# Altium PCB FMCOMMS3 - 副本 (2).PcbDoc (part 2 of 2)
Units mil, origin at the board's own origin, x right, y up, seen from the top; angles counter-clockwise.
Board outline 6000 x 4000 mil, 4 copper layers (Top Layer, Layer 1, Layer 2, Bottom Layer), stack 23.756 mil thick; 166 components, 138 nets, 751 pads, 368 vias.
Unrouted connection lines stored in the file: 399.
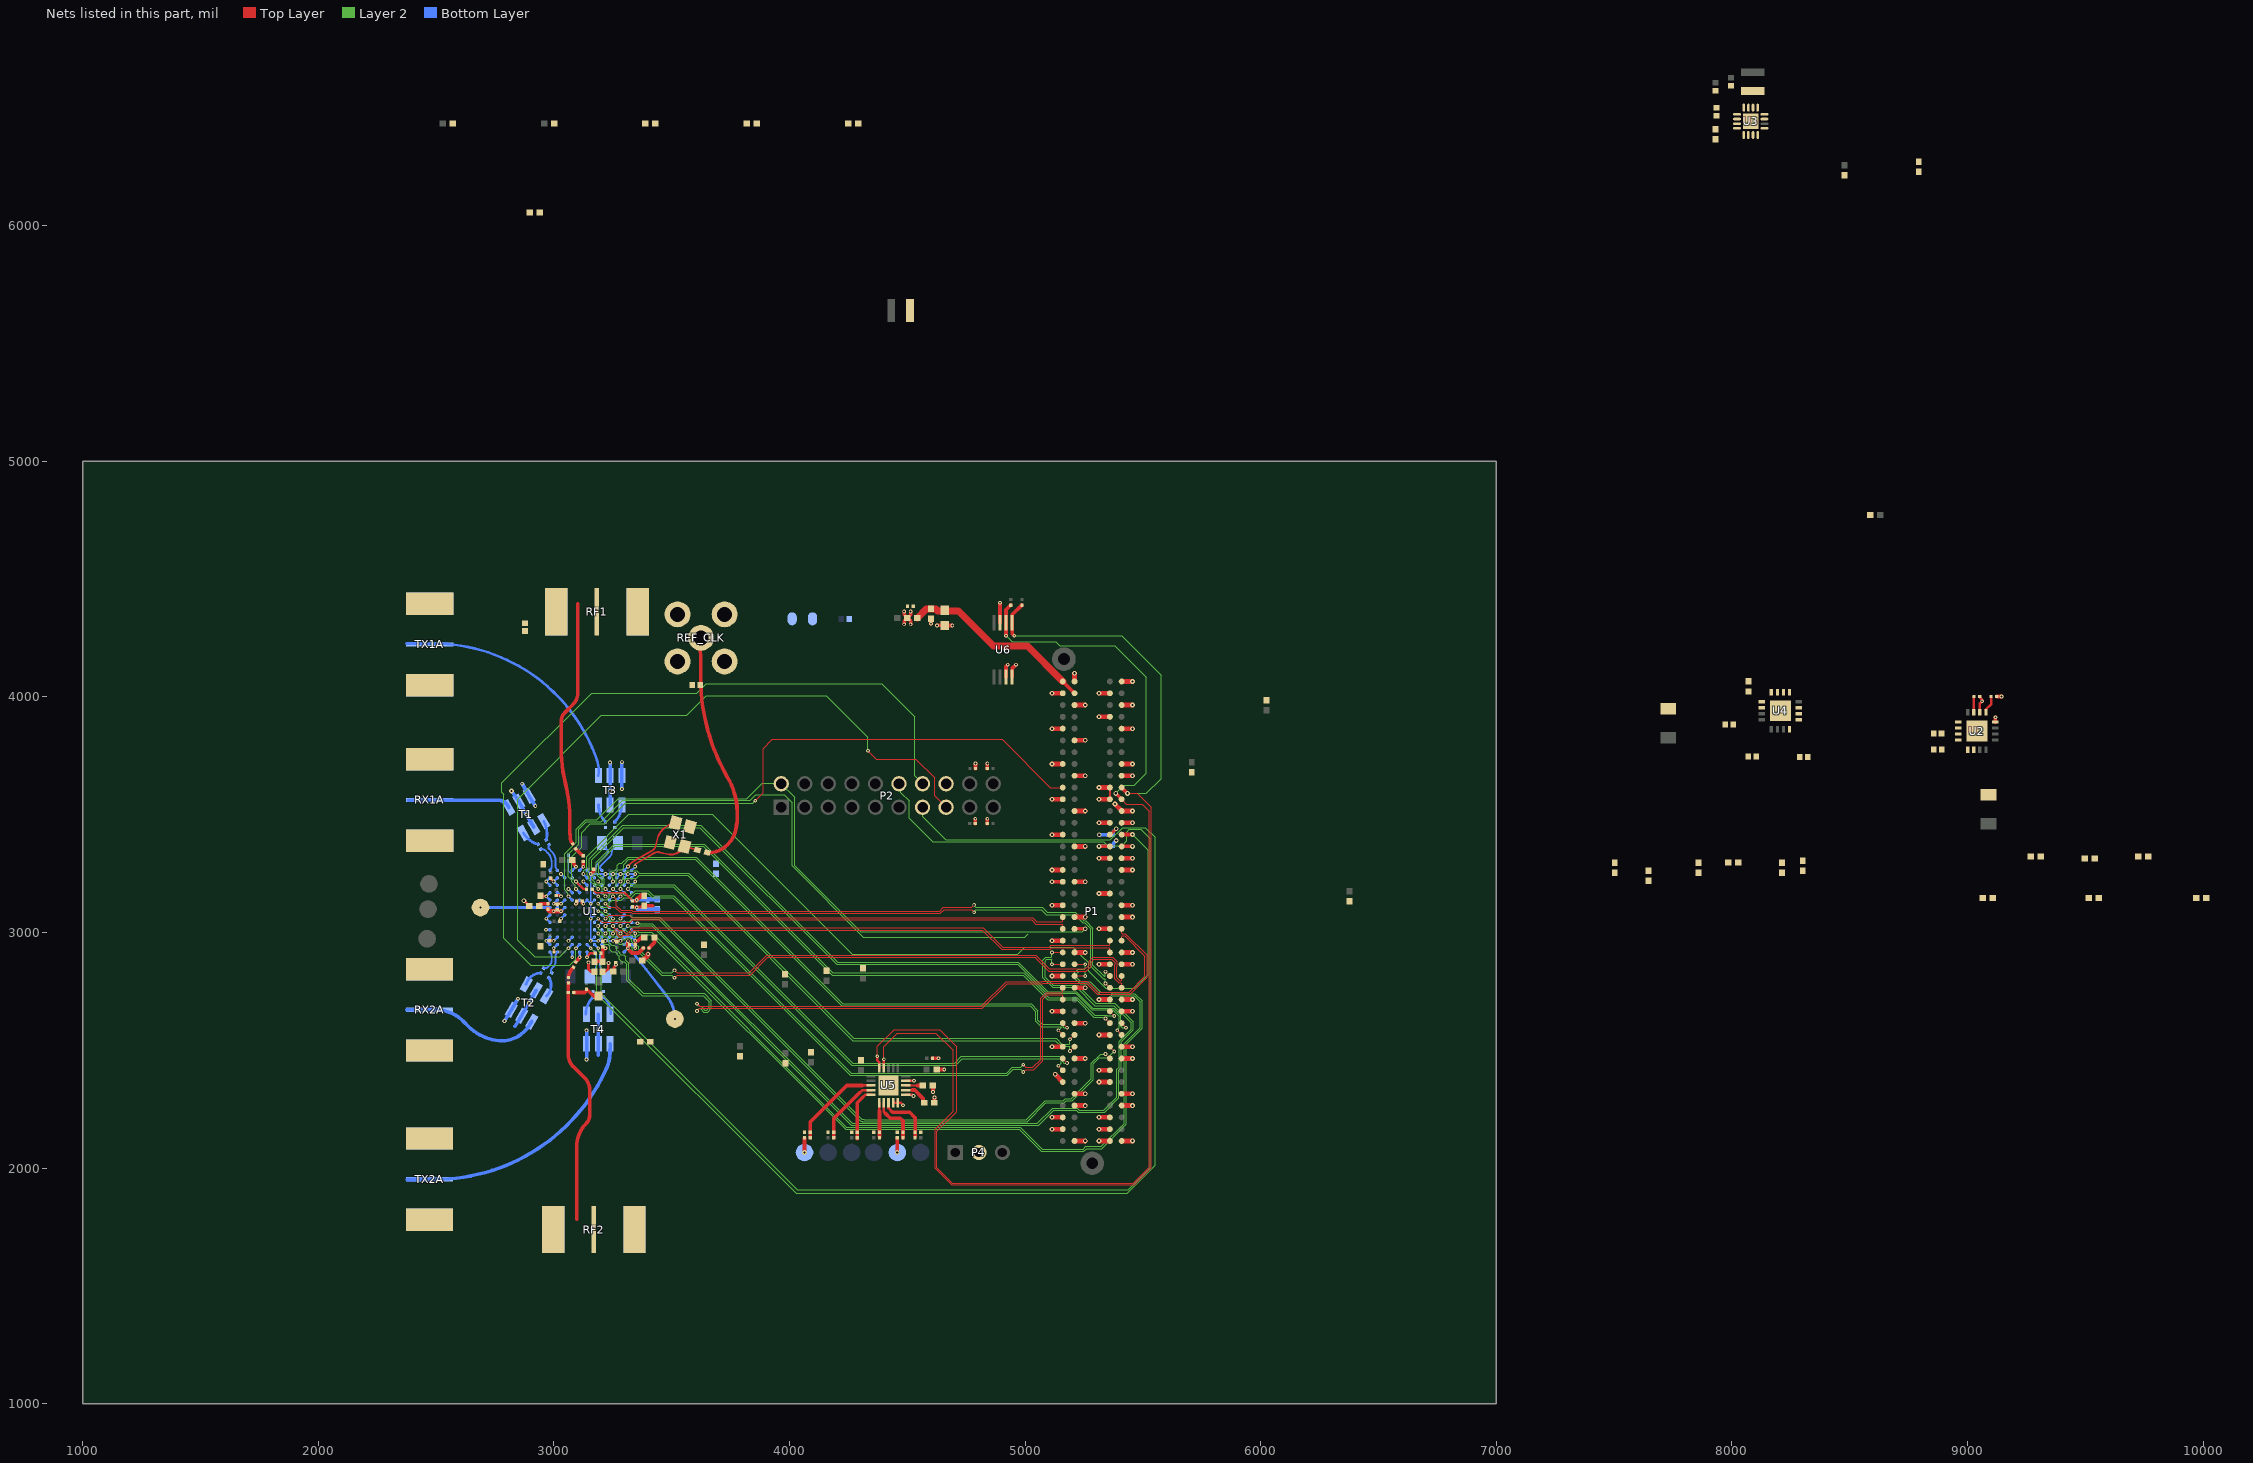
[diagram p3: the nets of this part, all layers, seen from the top]

## Via types
v1: diameter 15.75, hole 7.87, Top Layer to Bottom Layer, tented both sides, 155 vias
v2: diameter 20, hole 10, Top Layer to Bottom Layer, 145 vias
v3: diameter 16, hole 8, Top Layer to Bottom Layer, 68 vias

## Nets (pads, with @x,y where several pads share a name; then routed paths per layer and width w, separated by ;. In a path a pad name is that pad's centre, name@x,y a point inside that pad or via, vN(x,y) a via of type N, cw(c..) or ccw(c..) an arc to the next point about the centre after c; other vN are vias at no path point) (continued)
GND: C1.1 C2.2 C3.2 C4.2 C5.2 C6.2 C7.2 C8.2 C9.2 C10.2 C11.2 C12.2 C13.2 C14.2 C15.2 C16.2 C17.2 C18.2 C19.2 C20.2 C21.2 C22.2 C23.2 C24.2 C25.1 C26.2 C27.2 C28.1 C29.1 C30.1 C31.2 C32.2 C33.2 C34.2 C35.2 C36.2 C37.2 C38.2 C39.2 C40.2 C41.2 C42.2 C43.2 C44.2 C45.2 C46.2 C47.2 C48.2 C49.2 C50.2 C51.2 C52.2 C53.2 C54.2 C55.2 C56.2 C57.2 C58.2 C59.1 C61.1 C62.2 C63.2 C64.2 C71.1 C72.1 C75.1 C76.1 C77.1 C78.2 C79.1 C81.2 DS1.1 P1.C1 P1.C4 P1.C5 P1.C8 P1.C9 P1.C12 P1.C13 P1.C16 P1.C17 P1.C20 P1.C21 P1.C24 P1.C25 P1.C28 P1.C29 P1.C32 P1.C33 P1.C36 P1.C38 P1.C40 P1.D2 P1.D3 P1.D6 P1.D7 P1.D10 P1.D13 P1.D16 P1.D19 P1.D22 P1.D25 P1.D28 P1.D37 P1.D39 P1.G1 P1.G4 P1.G5 P1.G8 P1.G11 P1.G14 P1.G17 P1.G20 P1.G23 P1.G26 P1.G29 P1.G32 P1.G35 P1.G38 P1.G40 P1.H2 P1.H3 P1.H6 P1.H9 P1.H12 P1.H15 P1.H18 P1.H21 P1.H24 P1.H27 P1.H30 P1.H33 P1.H36 P1.H39 P4.2 R4.1 R7.2 R11.1 R23.2 R24.2 R25.2 R26.2 R27.2 R28.2 R29.1 R30.1 R31.1 R32.1 R33.1 R37.1 R38.1 R40.1 R41.1 REF_CLK.1 REF_CLK.2 REF_CLK.3 REF_CLK.4 RF1.1 RF1.2 RF1.3 RF1.4 RF2.1 RF2.2 RF2.3 RF2.4 RX1A.1 RX1A.2 RX1A.3 RX1A.4 RX2A.1 RX2A.2 RX2A.3 RX2A.4 T1.1 T1.2 T1.5 T2.1 T2.2 T2.5 T3.1 T3.2 T3.5 T4.1 T4.2 T4.5 TX1A.1 TX1A.2 TX1A.3 TX1A.4 TX2A.1 TX2A.2 TX2A.3 TX2A.4 U1.A4 U1.A6 U1.B1 U1.B2 U1.B12 U1.C1 U1.C2 U1.C4 U1.C7 U1.C8 U1.C9 U1.C10 U1.C11 U1.C12 U1.D1 U1.D12 U1.E1 U1.F1 U1.F3 U1.F7 U1.F9 U1.F11 U1.G12 U1.H1 U1.H2 U1.H3 U1.H6 U1.H7 U1.H10 U1.J1 U1.J2 U1.K1 U1.K2 U1.K12 U1.L1 U1.L2 U1.L3 U1.L7 U1.L8 U1.L9 U1.L10 U1.L11 U1.L12 U1.M4 U1.M6 U2.6 U2.17 U3.6 U3.7 U3.8 U3.15 U3.16 U3.20 U4.6 U4.17 U5.4 U5.5 U5.6 U5.9 U5.21 U6.3 U6.4 U6.7 X1.2 X1.4 | length 7175.7
  Top Layer w10: C24.2@2943,3154.75 ccw(c2947.25,3159) 2947.25,3152.99 v1(2967.75,3152.99) ; C18.2@2987,3230 ccw(c2991.25,3230) 2988.24,3227 v1(2999.25,3215.99) ; C42.2@2987.48,2965.75 2997.52,2965.75 v1(2999.25,2964.02) ; v1(2999.25,3121.5) v1(3030.74,3121.5) ; C56.2@3000.48,2917.76 v1@3000.48,2931.3 ; C21.2@3011,3157 3021.06,3157 cw(c3021.06,3143.31) v1(3030.74,3152.99) ; C23.2@3026.23,3047.51 3026.23,3053.99 v1(3030.75,3058.51) ; v1(3251.23,2964.01) C26.2@3263.74,2964.01 ; C26.2@3264.72,2964.01 v1(3282.72,2964.01) ; U5.9@4493.84,2370.21 v3(4529.03,2370.21)
  Top Layer w11: v1@3140.98,2896.69 3141.89,2896.69 3141.89,2898.2 3155.69,2912 C11.2@3174,2912 ; U5.4@4440,2277 U5.5@4459.69,2277 4471.81,2277 v3(4482.31,2266.5) ; U5.6@4493.84,2311.15 4521.21,2311.15 v3(4526.84,2305.52) ; C20.2@9051.74,3998.73 9062.24,3988.23 v3(9062.24,3981.23) 9052.54,3971.53 U2.6@9052.53,3933.53
  Top Layer w12: v2(2872.99,3134.76) C77.1@2895.75,3112 ; v1(3147.25,2872.75) 3147.25,2843.75 3157,2834 ; C9.2@3207,2833.75 3219.75,2833.75 3230.75,2844.75 v1@3230.75,2870.25 ; C47.2@3254.75,2830 3254.75,2853.75 v1@3263.5,2862.5 ; C53.2@3336.73,3108 v1@3349.98,3108 ; v1(3345.71,2932.53) v1(3345.71,2964.02) ; v1@3354.48,3108 3370.98,3108
  Top Layer w15.5: C45.2@3078.25,3307 3082.93,3305.06 ccw(c3119.83,3305.06) v1(3093.74,3278.97) ; R40.1@3085,2745 3131.5,2745 3139,2752.5 C72.1@3139,2759 3140,2759 C75.1@3174.64,2724.36 ; R38.1@3121.23,3132.51 3121.23,3125.5 v1(3125.23,3121.49) ; v1(3156.73,3247.47) v1(3156.73,3247.47) 3170,3260.81 C58.2@3170,3268 ; v1(3345.71,2964.02) 3355.75,2964.02 C79.1@3371.73,2980 ; C52.2@3376.73,3113.75 3420.48,3113.75 ; v3(4601,4310.25) C49.2@4601,4330.75 ; C63.2@4607,2466 v3(4632.5,2466) ; v3(4609.25,2322.5) C62.2@4609.25,2350 ; C61.1@4616,2277 v3(4616,2299.5) ; C64.2@4624.25,2418 v3(4657,2418) ; v3(4626,4303) 4658.75,4303 C48.2@4659,4302.75 v3@4691.25,4302.75 ; R29.1@4789,3462 v3(4789,3482.5) ; R32.1@4790,3696 v3(4790,3716.5) ; R30.1@4840,3462 v3(4840,3482.5) ; R31.1@4840,3696 v3(4840,3716.5) ; 4893.61,4378.96 v3(4893.61,4398.96) ; U6.7@4893.81,4313.92 4893.81,4378.76 ; U6.3@4919.41,4084 4919.41,4129.26 v3(4926.61,4136.46) ; U6.4@4945,4084 4945,4119.85 v3(4961.61,4136.46)
  Top Layer w20: C22.2@3376.25,2880 v1@3400,2903.75 ; v1@3400,2908.25 v1(3400.34,2908.25) ; v2(5114.18,2165) P1.H2@5160,2165 ; v2(5114.18,2215) P1.H3@5160,2215 ; v2(5114.18,2515) P1.H9@5160,2515 ; v2(5114.18,2665) P1.H12@5160,2665 ; v2(5114.18,2815) P1.H15@5160,2815 ; v2(5114.18,2965) P1.H18@5160,2965 ; v2(5114.18,3115) P1.H21@5160,3115 ; v2(5114.18,3265) P1.H24@5160,3265 ; v2(5114.18,3415) P1.H27@5160,3415 ; v2(5114.18,3565) P1.H30@5160,3565 ; v2(5114.18,3715) P1.H33@5160,3715 ; v2(5114.18,3865) P1.H36@5160,3865 ; v2(5114.18,4015) P1.H39@5160,4015 ; v2(5127.6,2397.4) P1.H6@5160,2365 ; P1.G1@5210,2115 v2(5255.82,2115) ; P1.G4@5210,2265 v2(5255.82,2265) ; P1.G5@5210,2315 v2(5255.82,2315) ; P1.G8@5210,2465 v2(5255.82,2465) ; P1.G11@5210,2615 v2(5255.82,2615) ; P1.G14@5210,2765 v2(5255.82,2765) ; P1.G17@5210,2915 v2(5255.82,2915) ; P1.G20@5210,3065 v2(5255.82,3065) ; P1.G23@5210,3215 v2(5255.82,3215) ; P1.G26@5210,3365 v2(5255.82,3365) ; P1.G29@5210,3515 v2(5255.82,3515) ; P1.G32@5210,3665 v2(5255.82,3665) ; P1.G35@5210,3815 v2(5255.82,3815) ; P1.G38@5210,3965 v2(5255.82,3965) ; P1.G40@5210,4065 v2(5210,4100) ; v2(5314.18,2165) P1.D2@5360,2165 ; v2(5314.18,2215) P1.D3@5360,2215 ; v2(5314.18,2365) P1.D6@5360,2365 ; v2(5314.18,2415) P1.D7@5360,2415 ; v2(5314.18,2565) P1.D10@5360,2565 ; v2(5314.18,2715) P1.D13@5360,2715 ; v2(5314.18,2865) P1.D16@5360,2865 ; v2(5314.18,3015) P1.D19@5360,3015 ; v2(5314.18,3165) P1.D22@5360,3165 ; v2(5314.18,3315) P1.D25@5360,3315 ; v2(5314.18,3465) P1.D28@5360,3465 ; v2(5314.18,3915) P1.D37@5360,3915 ; v2(5314.18,4015) P1.D39@5360,4015 ; v2(5381.73,3545) P1.C29@5410,3516.73 ; P1.C1@5410,2115 v2(5455.82,2115) ; P1.C4@5410,2265 v2(5455.82,2265) ; P1.C5@5410,2315 v2(5455.82,2315) ; P1.C8@5410,2465 v2(5455.82,2465) ; P1.C9@5410,2515 v2(5455.82,2515) ; P1.C12@5410,2665 v2(5455.82,2665) ; P1.C13@5410,2715 v2(5455.82,2715) ; P1.C16@5410,2865 v2(5455.82,2865) ; P1.C17@5410,2915 v2(5455.82,2915) ; P1.C20@5410,3065 v2(5455.82,3065) ; P1.C21@5410,3115 v2(5455.82,3115) ; P1.C24@5410,3265 v2(5455.82,3265) ; P1.C25@5410,3315 v2(5455.82,3315) ; P1.C28@5410,3465 v2(5455.82,3465) ; P1.C29@5410,3515 v2(5455.82,3515) ; P1.C32@5410,3665 v2(5455.82,3665) ; P1.C33@5410,3715 v2(5455.82,3715) ; P1.C36@5410,3865 v2(5455.82,3865) ; P1.C38@5410,3965 v2(5455.82,3965) ; P1.C40@5410,4065 v2(5455.82,4065)
  Bottom Layer w8: v1(3125.23,3121.49) U1.H6@3140.98,3137.24 v1(3156.74,3121.49) ; U1.M6@3140.98,3263.23 v1(3156.73,3247.47) v1(3219.71,3247.48) ; U1.C7@3172.48,2979.76 v1(3156.74,2964.01) ; U1.F7@3172.48,3074.25 v1(3156.74,3058.5) ; U1.H7@3172.48,3137.24 v1(3156.74,3121.49) ; U1.L7@3172.48,3231.73 v1(3156.73,3247.47) v1(3156.74,3121.49) ; U1.C8@3203.97,2979.76 v1(3188.23,2964.01) ; U1.L8@3203.97,3231.73 v1(3219.71,3247.48) ; U1.C9@3235.47,2979.76 v1(3219.73,2964.01) ; U1.L9@3235.47,3231.73 v1(3251.21,3247.48) ; U1.C10@3266.97,2979.76 v1(3251.23,2964.01) v1(3219.73,2964.01) ; U1.L10@3266.97,3231.73 v1(3282.71,3247.48) ; v1(3282.72,2964.01) U1.C11@3298.46,2979.76 U1.C12@3329.96,2979.76 v1(3345.71,2964.02) v1(3345.71,2995.52) U1.D12@3329.96,3011.26 ; U1.L11@3298.46,3231.73 v1(3314.2,3247.48) ; U1.B12@3329.96,2948.27 v1(3345.71,2932.53) ; U1.K12@3329.96,3200.24 v1(3345.7,3215.99) ; U1.L12@3329.96,3231.73 v1(3345.7,3247.48) v1(3314.2,3247.48) ; v1(3156.74,2964.01) v1(3156.74,3058.5) ; v1(3156.74,2964.01) v1(3188.23,2964.01) ; v1(3156.74,3058.5) v1(3156.74,3121.49) ; v1(3188.23,2964.01) v1(3219.73,2964.01) ; v1(3219.71,3247.48) v1(3251.21,3247.48) ; v1(3251.21,3247.48) v1(3282.71,3247.48) ; v1(3282.71,3247.48) v1(3314.2,3247.48)
  Bottom Layer w10: v1(2966.73,3011.26) U1.D1@2983.5,3011.26 ; U1.B1@2983.5,2948.27 v1(2967.75,2964.02) U1.C1@2983.5,2979.76 ; U1.E1@2983.5,3042.76 v1(2967.76,3058.5) U1.F1@2983.5,3074.25 ; U1.H1@2983.5,3137.24 v1(2967.75,3152.99) U1.J1@2983.5,3168.74 ; U1.K1@2983.5,3200.24 v1(2967.75,3215.99) U1.L1@2983.5,3231.73 ; v1(2999.25,2932.53) U1.B2@3015,2948.27 ; v1(2999.25,2964.02) U1.C2@3015,2979.76 ; v1(2999.25,3121.5) U1.H2@3015,3137.24 ; U1.J2@3015,3168.74 v1(3030.74,3152.99) ; U1.K2@3015,3200.24 2999.26,3215.99 U1.L2@3015,3231.73 ; v1(3030.75,3058.51) U1.F3@3046.49,3074.25 ; v1(3030.74,3121.5) U1.H3@3046.49,3137.24 ; v1(3030.75,3247.48) U1.L3@3046.49,3231.73 ; v1(3062.24,2964.02) U1.C4@3077.99,2979.76 ; v1(3077.99,2894.5) U1.A4@3077.99,2916.77 ; U1.M4@3077.99,3263.23 v1(3093.74,3278.97) ; v1(3140.98,2894.5) U1.A6@3140.98,2916.77 ; U1.F9@3235.47,3074.25 v1(3251.21,3058.51) ; U1.H10@3266.97,3137.24 v1(3282.71,3152.99) ; v1(3282.72,3058.51) U1.F11@3298.46,3074.25 ; U1.G12@3329.96,3105.75 v1(3352.23,3105.75)
  Bottom Layer w15.5: v3(2790.56,2624.31) T2.1@2819.8,2671.58 v3(2847.56,2718.31) ; v2(2820.57,3600.36) T1.2@2851.82,3555.21 v3(2883.07,3501.08) T1.5@2914.32,3446.95 ; 2834.56,2601.31 T2.2@2863.1,2646.58 v3(2894.35,2700.71) T2.5@2925.61,2754.84 ; v3(2865.57,3631.08) T1.1@2895.12,3580.21 v3(2921.57,3536.08) ; v3(3139,2460.7) T4.1@3139,2526.99 v3(3139.23,2584.47) ; 3189,2479.7 v3(3189,2585.47) T4.5@3189,2652 ; v3(3238.78,3721.52) T3.2@3239,3666.01 v3(3239,3600.52) T3.5@3239,3541 ; v3(3288.78,3608.52) T3.1@3289,3666.01 v3(3288.78,3722.52)
  Bottom Layer w20: v1(3352.23,3105.75) 3359.23,3098.75 C54.2@3441.73,3098.75
  other v1: 3263.44,2862.72 3232,2870
  other v3: 4691.5,4303
GPO0: P2.12 U1.B7 | length 5632.1
  Layer 2 w4: v1(3188.23,2932.52) 3189.17,2931.58 3189.17,2921.83 3202,2909 3202,2740 4034,1908 5438,1908 5531,2001 5531,3398 5492,3437 5443,3437 5432,3426 5432,3388 5411.83,3367.83 5350.17,3367.83 5333,3385 4608,3385 4508.25,3484.75 4508.25,3557.75 4473.5,3592.5 4473.5,3622.5 P2.12@4465,3631
  Bottom Layer w10: U1.B7@3172.48,2948.27 v1(3188.23,2932.52)
GPO1: P2.13 U1.B6 | length 5497.1
  Layer 2 w4: v1(3156.73,2932.52) 3183,2906.25 3183,2737 4028,1892 5433.31,1892 5553,2011.69 5553,3403 5511,3445 5414.36,3445 5362.36,3393 4663,3393 4565,3491 P2.13@4565,3531
  Bottom Layer w10: U1.B6@3140.98,2948.27 v1(3156.73,2932.52)
GPO2: P2.14 U1.B5 | length 3378.5
  Layer 2 w4: v1(3093.74,2932.53) 3094,2932.27 3093.74,2932.01 3093.74,2886.74 3067,2860 2903,2860 2788,2975 2788,3587 2780,3595 2780,3635 3160,4015 3606,4015 3647,4056 4391,4056 4531,3916 4531,3665 P2.14@4565,3631
  Bottom Layer w10: v1(3093.74,2932.53) U1.B5@3109.49,2948.27
GPO3: P2.15 U1.B4 | length 3152.3
  Top Layer w4: v3(4333,3771) 4368,3736 4536,3736 4616,3656 4616,3580 P2.15@4665,3531
  Layer 2 w4: v1(3062.24,2932.53) 3025.71,2896 2918,2896 2847,2967 2847,3566 3202,3921 3564,3921 3647,4004 4156,4004 4332,3828 v3@4332,3772
  Bottom Layer w10: v1(3062.24,2932.53) U1.B4@3077.99,2948.27
NetC4_1: C4.1 C5.1 C6.1 C28.2 E1.2 L1.2 U3.10 U3.11 U3.12
NetC12_1: C12.1 C13.1 C14.1 C15.1 C16.1 C17.1 R1.1 R2.2 U2.10 U2.11 U2.12 U2.13 U2.14
NetC20_1: C20.1 U2.7 | length 66.9
  Top Layer w11: U2.7@9026.94,3933.53 C20.1@9026.94,4000.43
NetC29_2: C29.2 U3.9
NetC31_1: C31.1 C32.1 C33.1 C34.1 C35.1 C36.1 R8.1 R9.2 U4.10 U4.11 U4.12 U4.13 U4.14
NetC39_1: C39.1 U4.7
NetC60_1: P2.16
NetC61_2: C61.2 U5.7 | length 107.7
  Top Layer w10: U5.7@4493.84,2330.84 4521.53,2330.84
  Top Layer w15.5: 4521.53,2330.84 4531.53,2330.84 4567.09,2295.28 C61.2@4567.09,2275.53
NetC62_1: C62.1 U5.8 | length 74.2
  Top Layer w10: U5.8@4493.84,2350.52 4541.84,2350.52
  Top Layer w15.5: 4541.84,2350.52 C62.1@4568.09,2350.52
NetC65_2: C65.2 T1.6 | length 80.7
  Bottom Layer w11.55: T1.6@2957.62,3471.95 cw(c2854.31,3417.17) 2970.36,3431.55 cw(c2873.51,3419.55) C65.2@2967.64,3393.78
NetC66_2: C66.2 T1.4 | length 80.5
  Bottom Layer w11.55: T1.4@2871.02,3421.95 ccw(c2961.2,3474.02) 2908.92,3383.96 ccw(c2961.15,3473.93) C66.2@2933,3373.78
NetC67_2: C67.2 T2.6 | length 84.6
  Bottom Layer w11.55: T2.6@2882.31,2779.84 cw(c2945.83,2761.72) 2920.56,2822.75 cw(c2945,2763.73) C67.2@2945,2827.61
NetC68_2: C68.2 T2.4 | length 84.6
  Bottom Layer w11.55: T2.4@2968.91,2729.84 ccw(c2924.25,2775.63) 2988.16,2778.25 ccw(c2933.31,2778.25) C68.2@2979.64,2807.61
NetC69_2: C69.2 T3.6 | length 80.9
  Bottom Layer w11.55: C69.2@3258,3469 ccw(c3186.22,3541.72) T3.6@3288.4,3541.72
NetC70_2: C70.2 T3.4 | length 80.5
  Bottom Layer w11.55: T3.4@3189.4,3541.72 ccw(c3293.53,3541.72) C70.2@3219,3469
NetC73_2: C73.2 T4.6 | length 80.9
  Bottom Layer w11.55: T4.6@3135.6,2652.28 cw(c3237.78,2652.28) C73.2@3166,2725
NetC74_2: C74.2 T4.4 | length 79.4
  Bottom Layer w11.55: C74.2@3211,2725 3213.65,2723.88 cw(c3142.8,2654.75) T4.4@3241.79,2654.75
NetC77_2: C77.2 R34.2 | length 34.8
  Top Layer w15.5: C77.2@2940.25,3122 R34.2@2975,3122
NetC79_2: C79.2 R35.2 | length 54.5
  Top Layer w15.5: R35.2@3404,2934 3427.5,2957.5 C79.2@3427.5,2978.75
NetC80_1: C80.1 R36.2 | length 44.5
  Top Layer w15.5: R36.2@3092.25,3355.11 ccw(c3467.09,3729.95) C80.1@3125,3325
NetC82_1: C82.1 R39.2 | length 49.2
  Top Layer w15.5: R39.2@3061.75,2808.75 cw(c3135.42,2799.63) C82.1@3082.93,2852.12
NetC83_1: C83.1 U1.M12 X1.1 | length 329.3
  Top Layer w8: v1@3345.71,3278.98 cw(c3351.62,3284.33) 3347.64,3291.23 3373.83,3306.33 3391.3,3316.4 3426.58,3336.81 cw(c3441.74,3310.61) 3449.87,3339.77 3484.25,3331.69 ccw(c3497.25,3387.01) 3519.46,3334.7 3536.42,3343.34 X1.1@3555.24,3359.48 ; X1.1@3555,3365 X1.1@3556.64,3364.55 ; X1.1@3556.64,3369.28 X1.1@3556.64,3364.55 ; C83.1@3610,3350 X1.1@3556.64,3364.55
  Bottom Layer w8: U1.M12@3329.96,3263.23 3329.96,3264.09 3345,3279.14 v1(3345,3280)
NetC83_2: C83.2 R41.2 REF_CLK.5 | length 988.6
  Top Layer w15.5: REF_CLK.5@3621.53,4230.17 cw(c-4477.47,4050.17) 3623.53,4050.49 ccw(c3639.03,4050.49) 3623.54,4049.94 ccw(c4471.09,4084.38) 3736.53,3660.17 cw(c3461.67,3501.45) 3772.05,3435.06 cw(c3651.14,3460.93) C83.2@3653.87,3337.31
NetDS1_2: DS1.2 R13.1
NetL2_1: L2.1 U3.1 U3.2 U3.3
NetP1_D27: P1.D27 R14.1 | length 65.7
  Top Layer w15.5: P1.D27@5361.73,3415 v2(5386.73,3440)
  Bottom Layer w15.5: R14.1@5373.73,3415 5373.73,3427 v2(5386.73,3440)
NetP1_D30: P1.D30 P1.D31 | length 141.6
  Top Layer w9: P1.D30@5360,3565 P1.D31@5360,3615
  Top Layer w20: v2(5314.18,3565) P1.D30@5360,3565 ; v2(5314.18,3615) P1.D31@5360,3615
NetR2_1: R2.1 R4.2 U2.9
NetR6_2: R6.2 R7.1 U3.5
NetR9_1: R9.1 R11.2 U4.9
NetR17_2: R17.2 R23.1 U5.3 | length 270.3
  Top Layer w11: U5.3@4420.31,2277 4420.31,2254 4432.81,2241.5
  Top Layer w15.5: 4432.81,2241.5 4437.81,2236.5 4510.31,2236.5 4533.31,2213.5 4533.31,2186.5 R23.1@4533.31,2151 ; R17.2@4533.31,2132.5 R23.1@4533.31,2151 ; 4533.31,2187.5 R23.1@4533.31,2151
NetR18_2: R18.2 R24.1 U5.2 | length 240.2
  Top Layer w11: U5.2@4400.63,2277 4400.62,2238.69 4407.81,2231.5
  Top Layer w15.5: 4407.81,2231.5 4427.81,2211.5 4470.31,2211.5 4482.31,2199.5 4482.31,2186.5 R24.1@4482.31,2157 ; R18.2@4482.31,2128 R24.1@4482.31,2153 ; 4482.31,2185.5 R24.1@4482.31,2157 ; R24.1@4482.31,2153 R24.1@4482.31,2157 ; R24.1@4482.31,2153 R24.1@4482.31,2157
NetR19_2: R19.2 R25.1 U5.1 | length 180.6
  Top Layer w11: 4380.94,2242.13 U5.1@4380.94,2277
  Top Layer w15.5: 4380.94,2242.13 4382.31,2240.76 4382.31,2186.5 ; R19.2@4382.31,2131.5 R25.1@4382.31,2152 ; R25.1@4382.31,2152 4382.31,2186.5 ; R25.1@4382.31,2152 4382.31,2186.5
NetR20_2: R20.2 R26.1 U5.20 | length 224.4
  Top Layer w11: 4311.29,2300.52 4321.92,2311.15 U5.20@4346.79,2311.15
  Top Layer w15.5: R20.2@4288.29,2125.52 4288.29,2153 4288.29,2180.52 4288.29,2277.52 4311.29,2300.52
NetR21_2: R21.2 R27.1 U5.19 | length 290.5
  Top Layer w11: 4297.54,2319.27 4309.1,2330.83 U5.19@4346.79,2330.84
  Top Layer w15.5: R21.2@4188.29,2128.02 4188.29,2154 4188.29,2180.52 4188.29,2210.02 4297.54,2319.27
NetR22_2: R22.2 R28.1 U5.18 | length 389.9
  Top Layer w11: 4308.79,2350.52 U5.18@4346.79,2350.52
  Top Layer w15.5: R22.2@4088.29,2128.02 4088.29,2180.52 4088.29,2195.02 4243.79,2350.52 4308.79,2350.52
NetR33_2: R33.2 U1.L4 | length 78.9
  Bottom Layer w4: R33.2@3062,3304 3064,3302 3064,3258.84 3077.99,3244.85 U1.L4@3077.99,3231.73
NetR36_1: R36.1 R37.2 RF1.5 | length 1048.4
  Top Layer w15.5: R36.1@3081,3375.39 cw(c3108.78,3403.17) 3069.5,3402.5 ccw(c2961.03,3402.46) 3068.62,3416.25 cw(c3176.23,3429.96) 3067.75,3430 3067.75,3486.25 ccw(c2482.6,3486.25) 3049.5,3631.25 cw(c3597.51,3771.42) 3032,3758.75 3032,3897.54 cw(c3083.21,3897.54) 3047,3933.75 3082,3968.75 ccw(c3033.72,4017.03) 3102,4017.03 3102,4393.75
NetR39_1: R39.1 R40.2 RF2.5 | length 1048.1
  Top Layer w15.5: R39.1@3062,2785 cw(c2161.25,2785) 3061.25,2748.25 3061.25,2480.84 ccw(c3132.09,2480.84) 3082,2430.75 3132,2380.75 cw(c3083.72,2332.47) 3152,2332.47 3152,2224.46 cw(c3100.79,2224.46) 3137,2188.25 ccw(c3233.57,2091.68) 3097,2091.68 3097,1783.25
NetRX1A_5: RX1A.5 T1.3 | length 438.6
  Bottom Layer w15.5: RX1A.5@2383,3561.61 2734.97,3561.61 2762.61,3560.83 2774.95,3560.05 cw(c2762.67,3512.44) T1.3@2808.52,3530.21
NetRX2A_5: RX2A.5 T2.3 | length 601.9
  Bottom Layer w15.5: RX2A.5@2375.06,2672.28 2495.92,2672.28 cw(c2495.93,2501.67) 2616.56,2622.31 2639.16,2599.7 ccw(c2782.55,2743.1) 2782.56,2540.31 ccw(c2782.56,2667.9) 2872.78,2577.68 2884.84,2589.74 2886.64,2591.55 T2.3@2906.4,2621.58
NetT3_3: T3.3 TX1A.5 | length 1090.4
  Bottom Layer w11.55: TX1A.5@2374.28,4226.03 2489.28,4226.03 cw(c2489.28,3492.27) 3183.65,3729.44 cw(c3059.48,3687.02) T3.3@3189,3666.01
NetT4_3: T4.3 TX2A.5 | length 1139.7
  Bottom Layer w15.5: TX2A.5@2378.73,1951.47 2493.73,1951.47 ccw(c2493.73,2752.58) 3227.23,2430.47 ccw(c3061.15,2492.01) 3238.23,2488.47 T4.3@3239,2526.99
NetU1_M11: U1.M11 X1.3 | length 320.5
  Top Layer w8: v1@3314.21,3278.98 cw(c3381.41,3232.64) 3340.64,3303.36 3366.83,3318.46 3384.29,3328.54 3391.69,3332.8 3396.07,3335.34 3419.57,3348.93 ccw(c3406.22,3372.01) 3432.68,3368.71 3441.02,3402.57 cw(c3520.05,3376.9) 3472.09,3444.76 3512.38,3473.08 3516.2,3469.26 X1.3@3518.2,3469.26
  Bottom Layer w8: U1.M11@3298.46,3263.23 3298.46,3263.34 3315,3279.89 v1(3315,3280)
PG_1P3_A: R3.2 U2.5 | length 59.3
  Top Layer w11: U2.5@9077,3945 9101.61,3969.61 R3.2@9101.61,3994.11
PG_1P3_B: R10.2 U4.5
PG_1P8V: U2.4 U4.4 | length 20.1
  Top Layer w15.5: U2.4@9118.48,3893.18 v3(9118.48,3913.29)
PG_1V8: R5.2 U3.4
PG_FMC: P1.D1 U3.13 | length 45.8
  Top Layer w20: v2(5314.18,2115) P1.D1@5360,2115
RESETB: P1.H31 R42.2 U1.K5 | length 2715.9
  Top Layer w4: v3(3855,3559) 3888,3592 3888,3780 3928,3820 4903,3820 5108,3615 P1.H31@5160,3615
  Top Layer w10: v1(3093.75,3215.99) 3093.75,3215.25 3094.75,3215.25 3126,3184 3138,3184 R42.2@3139,3183
  Layer 2 w4: v1(3093.75,3215.99) 3076,3233.74 3076,3320.31 3118,3362.31 3118,3424 3155,3461 3216,3461 3304,3549 3844,3549 v3@3855,3560
  Bottom Layer w10: v1(3093.75,3215.99) U1.K5@3109.49,3200.24
RX1A_N: C65.1 U1.M2 | length 122.4
  Bottom Layer w8: C65.1@2979.64,3373 2979.64,3370.21 cw(c2975.13,3370.21) 2978.32,3367.02 ccw(c2981.51,3363.84) 2977,3363.84 2977,3361.48 ccw(c2987.19,3361.48) 2979.98,3354.28 2992.14,3342.12 cw(c2955.58,3305.56) 3007.29,3305.56 3007.29,3281.84 ccw(c3033.61,3281.84) U1.M2@3015,3263.23
RX1A_P: C66.1 U1.M1 | length 116
  Bottom Layer w8: C66.1@2945,3353 2945.21,3353.21 2951.76,3353.21 cw(c2951.76,3337.41) 2962.94,3348.58 2974.76,3336.76 cw(c2935.05,3297.05) 2991.21,3297.05 2991.21,3281.84 cw(c2964.89,3281.84) U1.M1@2983.5,3263.23
RX2A_N: C67.1 U1.A1 | length 90.2
  Bottom Layer w8: C67.1@2957,2848.39 2957.08,2848.31 2963.63,2848.31 ccw(c2963.63,2864.12) 2974.81,2852.94 2980.69,2858.83 ccw(c2955.3,2884.22) 2991.21,2884.22 2991.21,2898.16 ccw(c2964.89,2898.16) U1.A1@2983.5,2916.77
RX2A_P: C68.1 U1.A2 | length 97
  Bottom Layer w8: C68.1@2991,2828.39 2991,2831.31 ccw(c2986.81,2831.31) 2989.77,2834.28 cw(c2992.73,2837.24) 2988.55,2837.24 2988.55,2839.72 cw(c2998.73,2839.72) 2991.53,2846.92 2997.92,2853.31 ccw(c2975.29,2875.94) 3007.29,2875.94 3007.29,2898.16 cw(c3033.61,2898.16) U1.A2@3015,2916.77
RX_D0_N: P1.H8 U1.K11 | length 2271.3
  Top Layer w4.96: P1.H8@5160,2464.18 v1(5178.54,2445.64)
  Layer 2 w4.02: v1(3314.21,3215.99) 3325.45,3204.75 3337.31,3204.75 3339.95,3202.11 3510.65,3202.11 4267.76,2445 4701.1,2445 4729.62,2473.52 5159,2473.52 5166.64,2465.88 5166.64,2455.08 5162.89,2451.33 5162.89,2447.99 5165.24,2445.64 v1(5178.54,2445.64)
  Bottom Layer w4.96: U1.K11@3298.46,3200.24 v1(3314.21,3215.99)
RX_D0_P: P1.H7 U1.J12 | length 2259.5
  Top Layer w4.96: v1(5141.46,2434.36) P1.H7@5160,2415.82
  Layer 2 w4.02: v1(3314.21,3184.49) 3325.45,3195.73 3333.57,3195.73 3336.21,3193.09 3506.91,3193.09 4264.02,2435.98 4704.84,2435.98 4733.36,2464.5 5155.27,2464.5 5157.62,2462.15 5157.62,2458.81 5153.87,2455.06 5153.87,2445.18 5143.05,2434.36 v1(5141.46,2434.36)
  Bottom Layer w4.96: v1(3314.21,3184.49) U1.J12@3329.96,3168.74
RX_D1_N: P1.G10 U1.K10 | length 2312.2
  Top Layer w4.96: v1(5190.64,2546.46) P1.G10@5209.18,2565
  Layer 2 w4.02: v1@3282.72,3217.72 v1(3282.72,3215.99) 3296.71,3229.98 3296.71,3249.62 3308.45,3261.36 3351.45,3261.36 3361.88,3250.93 3387,3250.93 ; 3387.02,3250.92 3571.84,3250.92 4272.76,2550 5132.53,2550 5156.56,2525.97 5188.29,2525.97 5190.64,2528.32 v1(5190.64,2546.46)
  Bottom Layer w4.96: U1.K10@3266.97,3200.24 v1(3282.72,3215.99)
RX_D1_P: P1.G9 U1.J11 | length 2311.1
  Top Layer w4.96: v1(5190.64,2496.46) P1.G9@5209.18,2515
  Layer 2 w4.02: v1(3282.71,3184.49) 3284.95,3186.73 3284.95,3197.95 3300.33,3213.32 3300.33,3221.74 3309.46,3230.87 3350.87,3230.87 3361.91,3241.91 3383.27,3241.91 ; 3383.28,3241.9 3568.1,3241.9 4269.02,2540.98 5128.79,2540.98 5152.82,2516.95 5188.29,2516.95 5190.64,2514.6 v1(5190.64,2496.46)
  Bottom Layer w4.96: v1(3282.71,3184.49) U1.J11@3298.46,3168.74
RX_D2_N: P1.H11 U1.K9 | length 2393.3
  Top Layer w4.96: P1.H11@5160,2614.18 v1(5178.54,2595.64)
  Layer 2 w4.02: v1(3251.22,3215.99) 3249.16,3218.05 3249.16,3229.89 3236.67,3242.39 3236.67,3252.57 3245.46,3261.36 3257.59,3261.36 3268.84,3272.61 3268.84,3284.73 3276.97,3292.86 3289.09,3292.86 3315.25,3319.02 3603.74,3319.02 4225.76,2697 5025.43,2697 5054.92,2667.52 5054.92,2626.79 5072.34,2609.37 5154.74,2609.37 5162.38,2601.73 5162.38,2597.99 5164.73,2595.64 v1(5178.54,2595.64)
  Bottom Layer w4.96: U1.K9@3235.47,3200.24 v1(3251.22,3215.99)
RX_D2_P: P1.H10 U1.J10 | length 2383.2
  Top Layer w4.96: v1(5141.46,2584.36) P1.H10@5160,2565.82
  Layer 2 w4.02: v1(3251.22,3184.49) 3265.1,3198.37 3265.1,3256.12 3274.08,3265.1 3288.47,3265.1 3296.6,3273.23 3296.6,3287.62 3318.98,3310 3600,3310 4222.02,2687.98 5021.7,2687.98 5045.9,2663.78 5045.9,2623.05 5068.6,2600.35 5151,2600.35 5153.36,2597.99 5153.36,2594.66 5143.05,2584.36 v1(5141.46,2584.36)
  Bottom Layer w4.96: v1(3251.22,3184.49) U1.J10@3266.97,3168.74
RX_D3_N: P1.D12 U1.K8 | length 2702.2
  Top Layer w4.96: P1.D12@5360,2664.18 v1(5378.54,2645.64)
  Layer 2 w4.02: v1(3188.22,3215.99) 3199.12,3205.09 3202.45,3205.09 3204.8,3207.45 3204.8,3222.44 3180.98,3246.26 3180.98,3298.74 3256.26,3374.02 3638.74,3374.02 4184.74,2828.02 4994.3,2828.02 5100.3,2722.02 5221.86,2722.02 5295.63,2648.24 5347.21,2648.24 5349.81,2645.64 v1(5378.54,2645.64)
  Bottom Layer w4.96: v1(3188.22,3215.99) U1.K8@3203.97,3200.24
RX_D3_P: P1.D11 U1.J9 | length 2658.5
  Top Layer w4.96: v1(5341.46,2634.36) P1.D11@5360,2615.82
  Layer 2 w4.02: v1(3219.72,3184.49) 3208.82,3195.39 3208.82,3198.72 3213.82,3203.71 3213.82,3226.18 3190,3250 3190,3295 3260,3365 3635,3365 4181,2819 4991.97,2819 5096.97,2714 5218.53,2714 5292.31,2640.22 5333.04,2640.22 5338.9,2634.36 v1(5341.46,2634.36)
  Bottom Layer w4.96: v1(3219.72,3184.49) U1.J9@3235.47,3168.74
RX_D4_N: P1.C11 U1.K7 | length 2918.2
  Top Layer w4.96: P1.C11@5410,2614.18 v1(5428.54,2595.64)
  Layer 2 w4.02: v1(3188.23,3184.49) 3188.23,3185 3174.12,3199.12 3172.7,3199.12 3150.98,3220.84 3150.98,3233.59 3142.85,3241.72 3142.85,3256.87 3150.98,3265 3150.98,3312.44 3292.53,3453.99 3623.77,3453.99 4204.74,2873.02 4971.98,2873.02 5095.98,2749.02 5217.54,2749.02 5287.56,2679 5376.16,2679 5407.02,2648.14 5407.02,2602.02 5413.4,2595.64 v1(5428.54,2595.64)
  Bottom Layer w4.96: U1.K7@3172.48,3200.24 v1(3188.23,3184.49)
RX_D4_P: P1.C10 U1.J8 | length 2934.2
  Top Layer w4.96: v1(5391.46,2584.36) P1.C10@5410,2565.82
  Layer 2 w4.02: v1(3219.72,3152.99) 3219.72,3155.28 3217.43,3155.28 3205.84,3166.87 3205.84,3186.52 3190.25,3202.11 3182.47,3202.11 3160,3224.58 3160,3231.23 3162.35,3233.59 3162.48,3233.59 3170.61,3241.72 3170.61,3254.39 3160,3265 3160,3308.7 3296.27,3444.97 3620.03,3444.97 4200,2865 4968.66,2865 5092.66,2741 5214.22,2741 5284.24,2670.98 5372.83,2670.98 5399,2644.82 5399,2595.07 5391.46,2587.53 v1(5391.46,2584.36)
  Bottom Layer w4.96: U1.J8@3203.97,3168.74 v1(3219.72,3152.99)
RX_D5_N: P1.H14 U1.J7 | length 2670.3
  Top Layer w4.96: v3(4992.23,2438.28) 5003.5,2427 5033.34,2427 5066,2459.66 5066,2719.67 5090.81,2744.48 5157.09,2744.48 5160,2747.39 P1.H14@5160,2765
  Layer 2 w4.02: v1(3188.23,3152.99) 3202.11,3139.11 3225.47,3139.11 3235.47,3149.11 3235.47,3156.88 3245.47,3166.87 3288.46,3166.87 3298.61,3156.73 3325.35,3156.73 3344.81,3176.18 3401.57,3176.18 3421.38,3156.38 3508.62,3156.38 4261.98,2403.02 4921.31,2403.02 4945.48,2427.19 4981.14,2427.19 v3(4992.23,2438.28)
  Bottom Layer w4.96: U1.J7@3172.48,3168.74 v1(3188.23,3152.99)
RX_D5_P: P1.H13 U1.H8 | length 2671.1
  Top Layer w4.96: v3(4992.23,2407.08) 5003.14,2418 5037.01,2418 5074.96,2455.95 5074.96,2715.96 5094.52,2735.52 5157.09,2735.52 5160,2732.61 P1.H13@5160,2715
  Layer 2 w4.02: v1(3188.22,3121.49) 3202.09,3107.62 3225.47,3107.62 3236.25,3118.39 3236.25,3126.16 3247.02,3136.93 3286.29,3136.93 3297.06,3147.71 3329.08,3147.71 3348.54,3167.16 3397.84,3167.16 3417.64,3147.36 3504.89,3147.36 4258.24,2394 4925.05,2394 4949.22,2418.17 4981.14,2418.17 v3(4992.23,2407.08)
  Bottom Layer w4.96: v1(3188.22,3121.49) U1.H8@3203.97,3137.24
RX_EXT_LO: TP102.1 U1.G1 | length 294.5
  Bottom Layer w11.55: v2(2688.72,3105.51) 2885.99,3105.51 ; 2886.23,3105.75 U1.G1@2983.5,3105.75
RX_FRAME_N: P1.D9 U1.G7 | length 2783.7
  Top Layer w4.96: P1.D9@5360,2513.36 v1(5378.54,2494.82)
  Layer 2 w4.02: v1(3188.23,3090) 3190.47,3087.76 3201.69,3087.76 3217.06,3072.38 3225.47,3072.38 3237.33,3060.53 3237.33,3052.76 3245.46,3044.63 3319.97,3044.63 3330.21,3054.87 3446.13,3054.87 4302.92,2198.08 4309,2198.08 4310,2197.08 5008.77,2197.08 5088.68,2277 5165.97,2277 5174.95,2285.98 5200.32,2285.98 5290.02,2375.68 5290.02,2441.65 5315.49,2467.11 5350.83,2467.11 v1(5378.54,2494.82)
  Bottom Layer w4.96: U1.G7@3172.48,3105.75 v1(3188.23,3090)
RX_FRAME_P: P1.D8 U1.G8 | length 2694.6
  Top Layer w4.96: v1(5341.46,2483.54) P1.D8@5360,2465
  Layer 2 w4.02: v1(3219.72,3090) 3219.72,3087.14 3226.46,3080.4 3228.79,3080.4 3239.47,3069.73 3242.8,3069.73 3245.46,3072.39 3324.61,3072.39 3333.11,3063.89 3449.87,3063.89 4307.53,2206.23 4315.55,2206.23 4316.68,2205.1 5005.44,2205.1 5085.36,2285.02 5162.65,2285.02 5171.63,2294 5197,2294 5282,2379 5282,2444.97 5320.57,2483.54 v1(5341.46,2483.54)
  Bottom Layer w4.96: U1.G8@3203.97,3105.75 v1(3219.72,3090)
RX_VCO_1P1V_SUPPLY: C78.1 R34.1 U1.G2 U1.G3 | length 103.7
  Top Layer w20: R34.1@2974.98,3098.26 2983.23,3090.01 v1(2999.25,3090.01) 3016.53,3090.01 v1(3030.74,3090.01)
  Bottom Layer w10: v1(2999.25,3090.01) U1.G2@3015,3105.75 ; v1(3030.74,3090.01) U1.G3@3046.49,3105.75
SCL: P1.C30 R16.1 U5.15 U6.6 | length 5052.1
  Top Layer w4: v3(4372.81,2474.55) 4372.81,2515.82 4444,2587 4638,2587 4710,2515 4710,2239 4626,2155 4626,2001.64 4691.64,1936 5460,1936 5528,2004 5528,3515 5498,3545 5430,3545 P1.C30@5410,3565
  Top Layer w11: v3(4372.81,2474.55) 4372.81,2457.05 4380.94,2448.92 U5.15@4380.94,2424.05
  Top Layer w15.5: v3(4919.41,4259.26) U6.6@4919.41,4313.92 4919.41,4369.76 R16.1@4939.11,4389.46 ; v2@5391.46,3584.36 P1.C30@5410,3565.82
  Layer 2 w4: v3(4919.41,4259.26) 4945,4233.67 5130.67,4233.67 5148.34,4216 5381,4216 5515,4082 5515,3676 5463,3624 5419,3624 v2(5385,3590)
SDA: P1.C31 R15.1 U5.14 U6.5 | length 5084.2
  Top Layer w4: v3(4400.62,2461.74) 4400.62,2515.62 4458,2573 4621,2573 4695,2499 4695,2241 4618,2164 4618,1998.32 4688.32,1928 5463.31,1928 5536,2000.69 5536,3531 5477,3590 v2(5435,3590)
  Top Layer w11: U5.14@4400.63,2424.05 v3(4400.62,2461.74)
  Top Layer w15.5: v3(4954.11,4258.96) 4945,4268.07 U6.5@4945,4313.92 4945,4347.85 R15.1@4986.61,4389.46 ; P1.C31@5410,3614.18 v2@5428.54,3595.64
  Layer 2 w4: v3(4954.11,4258.96) 5410.04,4258.96 5578,4091 5578,3653 5515,3590 v2(5435,3590)
SPI_CLK: R14.2 U1.J5 | length 2722.4
  Layer 2 w4: v1(3093.75,3184.49) 3091.76,3186.48 3091.76,3198.36 3076.11,3214.01 3076.11,3221.73 3062,3235.84 3062,3331 3106,3375 3106,3437 3138,3469 3201,3469 3292,3560 3833,3560 3857,3584 3977,3584 4011,3550 4011,3283 4314,2980 4998,2980 5013,2995
  Bottom Layer w10: v1(3093.75,3184.49) U1.J5@3109.49,3168.74
  Bottom Layer w15.5: v2(5314.45,3415) R14.2@5350,3415
SPI_DI: P1.C26 U1.J4 | length 68.1
  Top Layer w15.5: P1.C26@5410,3365 v2(5455.82,3365)
  Bottom Layer w10: v1(3062.25,3184.49) U1.J4@3077.99,3168.74
SPI_DO: P1.C27 U1.L6 | length 3604.2
  Top Layer w15.5: P1.C27@5410,3415.82 v2(5455.82,3415.82)
  Layer 2 w4: v1(3125.24,3247.48) 3127.49,3249.73 3127.49,3260.91 3139.11,3272.53 3139.11,3322.11 3319,3502 3673,3502 4267,2908 4970,2908 4998,2936 5204.44,2936 5237.07,2903.37 5270,2870.44 5270,2835.38 5343.38,2762 5464,2762 5523,2821 5523,3348.64 v2(5455.82,3415.82)
  Bottom Layer w10: v1(3125.24,3247.48) U1.L6@3140.98,3231.73
SPI_ENB: P1.D26 R12.1 U1.K6 | length 106.5
  Top Layer w15.5: v2(5314.18,3365) P1.D26@5360,3365
  Layer 2 w4: v1@3123.24,3217.99 v1(3125.24,3215.99)
  Bottom Layer w10: v1(3125.24,3215.99) U1.K6@3140.98,3200.24
  Bottom Layer w15.5: v2(5314.18,3365) R12.1@5349.73,3365
SYNC_IN: P1.H23 R38.2 U1.H5 | length 80.5
  Top Layer w15.5: v1(3093.74,3121.5) 3097.23,3124.99 R38.2@3097.23,3132.51 ; v2(5114.18,3215) P1.H23@5160,3215
  Bottom Layer w10: v1(3093.74,3121.5) U1.H5@3109.49,3137.24
TX1A_N: C69.1 L3.2 U1.M8 | length 115.4
  Bottom Layer w8: U1.M8@3203.97,3263.23 3199.21,3267.99 cw(c3206.32,3275.1) 3196.27,3275.1 cw(c3206.32,3275.1) 3199.21,3282.21 3235.6,3318.6 ccw(c3210.31,3343.9) 3246.08,3343.9 cw(c3261.01,3343.9) 3246.08,3344 cw(c3261.01,3343.9) 3250.44,3354.44 L3.2@3251.6,3355.6
TX1A_P: C70.1 L4.2 U1.M7 | length 135.8
  Bottom Layer w8: U1.M7@3172.48,3263.23 3174.89,3265.64 ccw(c3162.09,3278.43) 3180.19,3278.43 cw(c3198.28,3278.43) 3185.48,3291.23 3224.16,3329.9 ccw(c3210.06,3344) 3230,3344 ccw(c3222.76,3344) 3227.88,3349.12 3212.12,3364.88 ccw(c3207,3359.76) L4.2@3207,3367
TX2A_N: C73.1 L5.2 U1.A7 | length 85.2
  Bottom Layer w8: L5.2@3171.65,2835.83 ccw(c3151.48,2856) 3180,2856 3180,2898.62 ccw(c3154.33,2898.62) U1.A7@3172.48,2916.77
TX2A_P: C74.1 L6.2 U1.A8 | length 96.4
  Bottom Layer w8: U1.A8@3203.97,2916.77 ccw(c3222.57,2898.17) 3196.26,2898.17 3196.26,2867.15 3196.26,2867.09 ccw(c3253.12,2867.09) L6.2@3212.92,2826.89
TX_D0_N: P1.H17 U1.E12 | length 3442.4
  Top Layer w4.96: v1(5114.18,2915) P1.H17@5160,2915
  Layer 2 w4.02: v1(3355,3038.88) 3355.88,3038 3364,3038 3364.74,3037.26 3418.49,3037.26 4265.7,2190.06 4305.68,2190.06 4306.68,2189.06 5052.84,2189.06 5117.8,2254.02 5221.74,2254.02 5229.76,2246 5334,2246 5389,2301 5389,2418.76 5398.98,2428.74 5398.98,2538.88 5449.98,2589.88 5449.98,2616.52 5376.75,2689.75 5295.67,2689.75 5219.21,2766.21 5116.79,2766.21 5076.06,2806.94 5076.06,2881.82 5088.75,2894.51 5111.83,2894.51 5114.18,2896.86 v1(5114.18,2915)
  Bottom Layer w4.02: U1.E12@3329.96,3042.76 3331.87,3040.85 3336.45,3040.85 3337.3,3040 3353.88,3040 v1(3355,3038.88)
TX_D0_P: P1.H16 U1.D11 | length 3479.6
  Top Layer w4.96: v1(5114.18,2865) P1.H16@5160,2865
  Layer 2 w4.02: v1(3314.21,3027.01) 3316.23,3024.99 3360.75,3024.99 3364,3028.24 3414.76,3028.24 4261.96,2181.04 4982.64,2181.04 4982.68,2181 5057.54,2181 5121.54,2245 5218,2245 5226.02,2236.98 5337.74,2236.98 5398.02,2297.26 5398.02,2415.02 5408,2425 5408,2535.14 5459,2586.14 5459,2620.25 5380.49,2698.77 5299.41,2698.77 5222.95,2775.23 5120.52,2775.23 5085.08,2810.68 5085.08,2878.08 5092.49,2885.49 5111.83,2885.49 5114.18,2883.14 v1(5114.18,2865)
  Bottom Layer w4.96: U1.D11@3298.46,3011.26 v1(3314.21,3027.01)
TX_D1_N: P1.G16 U1.E11 | length 3613.2
  Top Layer w4.96: P1.G16@5210,2865 v1(5255.82,2865)
  Layer 2 w4.02: v1(3282.71,3027.01) 3282.71,3024.62 3291.56,3015.77 3298.62,3015.77 3314.37,3000.02 3330.58,3000.02 3339.96,3009.4 3351.46,3009.4 3360.84,3000.02 3414.74,3000.02 4241.74,2173.02 4979.32,2173.02 5071.96,2080.38 5246.38,2080.38 5257.38,2091.38 5322.62,2091.38 5420,2188.76 5420,2528.02 5488,2596.02 5488,2705.46 5462.45,2731.01 5366.99,2731.01 5361,2737 5316.99,2737 5271.99,2782 5233.26,2782 5206.98,2808.28 5206.98,2825.7 5225.79,2844.51 5253.47,2844.51 5255.82,2846.86 v1(5255.82,2865)
  Bottom Layer w4.96: v1(3282.71,3027.01) U1.E11@3298.46,3042.76
TX_D1_P: P1.G15 U1.D10 | length 3613.2
  Top Layer w4.96: P1.G15@5210,2815 v1(5255.82,2815)
  Layer 2 w4.02: v1(3282.72,2995.51) 3282.72,2997.91 3291.56,3006.75 3294.89,3006.75 3310.64,2991 3330.6,2991 3339.96,2981.64 3351.46,2981.64 3360.82,2991 3411,2991 4238,2164 4975.59,2164 5068.23,2071.36 5250.11,2071.36 5261.11,2082.36 5326.36,2082.36 5429.02,2185.02 5429.02,2524.28 5497.02,2592.28 5497.02,2709.2 5466.19,2740.03 5370.73,2740.03 5364.74,2746.02 5320.73,2746.02 5275.73,2791.02 5237,2791.02 5216,2812.02 5216,2821.96 5229.53,2835.49 5253.47,2835.49 5255.82,2833.14 v1(5255.82,2815)
  Bottom Layer w4.96: U1.D10@3266.97,3011.26 v1(3282.72,2995.51)
TX_D2_N: P1.D18 U1.E10 | length 2213.6
  Top Layer w4.96: v1(3251.22,3027.01) 3251.22,3024.09 3256.52,3018.79 3256.52,3018.65 3259.42,3015.74 3267.24,3015.74 3273.12,3009.86 3290.81,3009.86 3300.95,2999.72 3304.34,2996.34 3313.55,2996.34 3336.05,3018.83 4822.84,3018.83 4904.34,2937.34 5103.54,2937.34 5110.69,2944.48 5357.09,2944.48 5360,2947.39 P1.D18@5360,2965
  Layer 2 w4.02: v1(3251.22,3027.01) v1@3253.46,3024.77
  Bottom Layer w4.96: v1(3251.22,3027.01) U1.E10@3266.97,3042.76
TX_D2_P: P1.D17 U1.D9 | length 2223.7
  Top Layer w4.96: v1(3251.22,2995.51) 3251.22,2998.43 3256.52,3003.73 3256.52,3003.87 3259.42,3006.78 3263.53,3006.78 3268.37,3001.95 3268.37,2989.56 3276.77,2981.16 3289.16,2981.16 3295.38,2987.38 3317.27,2987.38 3339.76,3009.87 4819.13,3009.87 4900.62,2928.38 5107.26,2928.38 5114.4,2935.52 5357.09,2935.52 5360,2932.61 P1.D17@5360,2915
  Layer 2 w4.02: v1(3251.22,2995.51) v1@3252.08,2995.51
  Bottom Layer w4.96: U1.D9@3235.47,3011.26 v1(3251.22,2995.51)
TX_D3_N: P1.C15 U1.E9 | length 2514.6
  Top Layer w4.96: v3(3512,2839) 3523.12,2827.88 3829.88,2827.88 3904.62,2902.62 5046.05,2902.62 5054.34,2894.34 5103.67,2845 5256.12,2845 5271.71,2860.6 5271.71,2878.05 5288,2894.34 5371.71,2894.34 5390.96,2875.09 5390.96,2855.94 5390.06,2855.04 5390.06,2806.74 5402.32,2794.48 5407.09,2794.48 5410,2797.39 P1.C15@5410,2815
  Layer 2 w4.02: v1(3219.72,3027.01) 3219.72,3023.89 3227.84,3015.77 3234.91,3015.77 3241.71,3008.97 3245.04,3008.97 3245.47,3009.39 3256.97,3009.39 3267.38,2998.99 3267.38,2988.38 3276.69,2979.07 3287.3,2979.07 3296.6,2969.76 3301.43,2969.76 3308.46,2976.79 3319.96,2976.79 3329.96,2966.79 3329.96,2960.14 3339.96,2950.14 3347.74,2950.14 3359.59,2938.28 3359.59,2929.33 3461.01,2827.91 3500.91,2827.91 v3(3512,2839)
  Bottom Layer w4.96: v1(3219.72,3027.01) U1.E9@3235.47,3042.76
TX_D3_P: P1.C14 U1.D8 | length 2515.4
  Top Layer w4.96: v3(3512,2807.8) 3523.12,2818.92 3833.59,2818.92 3908.34,2893.66 5042.34,2893.66 5048,2888 5099.96,2836.04 5259.83,2836.04 5280.67,2856.88 5280.67,2874.34 5291.71,2885.38 5368,2885.38 5382,2871.38 5382,2864 5381.1,2863.1 5381.1,2803.03 5398.61,2785.52 5407.09,2785.52 5410,2782.61 P1.C14@5410,2765
  Layer 2 w4.02: v1@3220.46,2995.51 v1(3219.72,2995.51) 3219.72,2998.63 3227.84,3006.75 3231.17,3006.75 3237,3000.92 3237,2990.1 3245.47,2981.63 3260.63,2981.63 3268.8,2973.45 3268.8,2958.3 3276.97,2950.13 3288.47,2950.13 3290.67,2952.33 3302.35,2952.33 3305.66,2949.02 3317.35,2949.02 3331.83,2934.54 3331.83,2926.78 3339.96,2918.65 3357.52,2918.65 3457.27,2818.89 3500.91,2818.89 v3(3512,2807.8)
  Bottom Layer w4.96: U1.D8@3203.97,3011.26 v1(3219.72,2995.51)
TX_D4_N: P1.C19 U1.E8 | length 3088.2
  Top Layer w4.96: v3(3608,2666) 3619.12,2677.12 4818.79,2677.12 4924.34,2782.66 5074.92,2782.66 5076.24,2783.98 5260.15,2783.98 5307.09,2737.04 5445.71,2737.04 5517.96,2809.29 5517.96,2902.71 5426.19,2994.48 5412.91,2994.48 5410,2997.39 P1.C19@5410,3015
  Layer 2 w4.02: v1(3188.22,3027.01) 3190.46,3024.77 3190.46,3013.55 3205.84,2998.18 3205.84,2989.76 3214.94,2980.65 3223.97,2980.65 3233.61,2971.01 3233.61,2958.14 3245.35,2946.4 3256.97,2946.4 3267.38,2936 3267.38,2924.38 3270.57,2921.19 3279.02,2912.74 3279.02,2908.74 3281.9,2905.86 3285.23,2905.86 ; 3285.25,2905.88 3296.75,2905.88 3305.38,2897.26 3305.38,2882.38 3318.99,2868.77 3318.99,2800.99 3378.98,2741 3637.76,2741 3668.31,2710.44 3668.31,2677.56 3652.24,2661.48 3636.83,2661.48 3621.22,2677.09 3617.89,2677.09 3608,2667.2 v3(3608,2666)
  Bottom Layer w4.96: v1(3188.22,3027.01) U1.E8@3203.97,3042.76
TX_D4_P: P1.C18 U1.D7 | length 3011.6
  Top Layer w4.96: v3(3608,2697.2) 3619.12,2686.08 4815.08,2686.08 4920.62,2791.62 5071.21,2791.62 5072.53,2792.94 5263.86,2792.94 5310.8,2746 5442,2746 5509,2813 5509,2899 5422.48,2985.52 5412.91,2985.52 5410,2982.61 P1.C18@5410,2965
  Layer 2 w4.02: v1(3188.23,2995.51) 3188.23,2993.77 3197,2985 3197,2980 3205.85,2971.15 3205.85,2958.26 3213.98,2950.13 3229.12,2950.13 ; 3229.12,2949.88 3237.37,2941.63 3237.37,2938.3 ; 3237.34,2938.27 3237.34,2926.77 3246.11,2918 3261,2918 3267.38,2911.62 3270,2909 3270,2905 3277.12,2897.88 3277.12,2886.25 3287.37,2876 3299,2876 3309.97,2865.03 3309.97,2797.25 3375.24,2731.98 3634.02,2731.98 3659.29,2706.71 3659.29,2681.29 3648.5,2670.5 3640.57,2670.5 3624.96,2686.11 3617.89,2686.11 3608,2696 v3(3608,2697.2)
  Bottom Layer w4.96: U1.D7@3172.48,3011.26 v1(3188.23,2995.51)
TX_D5_N: P1.H20 U1.F8 | length 1999.1
  Top Layer w4.96: v1(3219.72,3058.5) 3234.08,3072.86 3320.17,3072.86 3330.84,3062.19 5031.71,3062.19 5049.42,3044.48 5157.09,3044.48 5160,3047.39 P1.H20@5160,3065
  Bottom Layer w4.96: U1.F8@3203.97,3074.25 v1(3219.72,3058.5)
TX_D5_P: P1.H19 U1.E7 | length 2029.9
  Top Layer w4.96: v1(3188.23,3058.51) 3202.59,3044.15 3234.05,3044.15 3325.61,3044.16 3334.68,3053.23 5028,3053.23 5045.71,3035.52 5157.09,3035.52 5160,3032.61 P1.H19@5160,3015
  Bottom Layer w4.96: U1.E7@3172.48,3042.76 v1(3188.23,3058.51)
TX_EXT_LO: TP101.1 U1.A12 | length 345
  Bottom Layer w10: U1.A12@3329.96,2916.77 3345.71,2901.02
  Bottom Layer w11.55: 3345.71,2901.02 3390.74,2843.49 3481.43,2727.63 cw(c3359.89,2632.5) v1@3514.23,2632.5
  other v1: 3513.97,2632.5
TX_FRAME_N: P1.D15 U1.H9 | length 2429.5
  Top Layer w4.96: v1(3251.22,3152.99) 3265.57,3138.64 3265.57,3113.48 3285.53,3093.53 3331.47,3093.53 3334.57,3090.43 4637.43,3090.43 4652.88,3105.88 4772.88,3105.88 v3(4784,3117) ; v1(5341.46,2833.54) P1.D15@5360,2815
  Layer 2 w4.02: v3(4784,3117) 4784,3113.76 4789.46,3108.29 ; 4789.46,3108.26 4791.82,3105.91 5072.95,3105.91 5093.86,3085 5213.18,3085 5249.19,3048.99 5257.23,3048.99 5288,3018.22 5288,2860.82 5335.77,2813.05 5339.11,2813.05 5341.46,2815.4 v1(5341.46,2833.54)
  Bottom Layer w4.96: U1.H9@3235.47,3137.24 v1(3251.22,3152.99)
TX_FRAME_P: P1.D14 U1.G9 | length 2436.9
  Top Layer w4.96: v1(3219.72,3121.5) 3234.07,3107.15 3259.23,3107.15 3279.19,3087.19 3281.81,3084.57 3327.76,3084.57 3330.86,3081.47 4641.14,3081.47 4656.59,3096.92 4772.88,3096.92 v3(4784,3085.8) ; v1(5341.46,2783.54) P1.D14@5360,2765
  Layer 2 w4.02: v3(4784,3085.8) 4784,3089.04 4789.46,3094.51 ; 4789.46,3094.54 4791.82,3096.89 5069.21,3096.89 5090.12,3075.98 5209.44,3075.98 5245.45,3039.97 5253.49,3039.97 5278.98,3014.48 5278.98,2857.09 5332.04,2804.03 5339.11,2804.03 5341.46,2801.68 v1(5341.46,2783.54)
  Bottom Layer w4.96: v1(3219.72,3121.5) U1.G9@3235.47,3105.75
TX_MON1: C80.2 U1.M5 | length 44.1
  Top Layer w15.5: C80.2@3125.1,3300.71 ccw(c3191.59,3290.27) v1(3125.24,3278.97)
  Bottom Layer w10: U1.M5@3109.49,3263.23 v1(3125.24,3278.97)
TX_MON2: C82.2 U1.A5 | length 49.1
  Top Layer w15.5: C82.2@3093.05,2873.38 ccw(c3016.52,2949.91) v1(3109.49,2894.5)
  Bottom Layer w10: v1(3109.49,2894.5) U1.A5@3109.49,2916.77
TX_VCO_1P1V_SUPPLY: C81.1 R35.1 U1.A11 U1.B11 | length 165.9
  Top Layer w15.5: v1@3314.21,2930.29 3331.85,2912.65 3359,2912.65 R35.1@3380.48,2934.13 ; v1@3314.21,2931.4 3314.21,2940.86 v1(3314.21,2962.9) ; C81.1@3314.66,2941.84 C81.1@3320.18,2947.36
  Bottom Layer w10: U1.A11@3298.46,2916.77 v1(3314.21,2932.52) ; U1.B11@3298.46,2948.27 3299.02,2948.27 3313.65,2962.9 v1(3314.21,2962.9)
TXNRX: P1.G19 P2.2 U1.H4 | length 3058.3
  Top Layer w15.5: P1.G19@5210,3015 v2(5255.82,3015)
  Layer 2 w4: v1(3062.25,3152.99) 3060,3155.24 3060,3166.42 3046,3180.42 3046,3333 3095,3382 3095,3438 3134.5,3477.5 3182.5,3477.5 3273,3568 3819,3568 3885,3634 3962,3634 4023,3573 4023,3283 4303,3003 5243.82,3003 v2(5255.82,3015)
  Bottom Layer w10: v1(3062.25,3152.99) U1.H4@3077.99,3137.24
VADJ: C48.1 C49.1 E3.2 P1.G39 P1.H40 | length 838.6
  Top Layer w15.5: C49.1@4596.73,4364.5 C49.1@4596.73,4372.5 ; P1.H40@5160,4065 P1.G39@5210,4015
  Top Layer w30: E3.2@4542.98,4335 4580.48,4372.5 4596.73,4372.5 4621.73,4372.5 4629.48,4364.75 4656.73,4364.75 4716.98,4364.75 4866.73,4215 5010,4215 P1.H40@5160,4065
VDD_INTERFACE: C50.1 C51.1 C52.1 C53.1 C54.1 C55.1 E2.1 E3.1 R3.1 R10.1 R12.2 R18.1 R42.1 TP243.1 U1.H12 | length 603.1
  Top Layer w7: R42.1@3163.73,3182.5 3177.73,3168.5 3300.23,3168.5
  Top Layer w9: 3300.23,3168.5 C53.1@3336.73,3132
  Top Layer w12: C53.1@3336.73,3132 3346.49,3132 v1@3352.23,3137.74 ; 3370.74,3156.25 C52.1@3376.73,3156.25
  Top Layer w15.5: v2(4458,2066) R18.1@4458,2128 ; v3(4487,4307.5) 4487,4321.25 E3.1@4500.75,4335 ; v3(4487,4362.5) 4487,4348.75 E3.1@4500.75,4335 ; v3(4514.5,4307.5) 4514.5,4321.25 E3.1@4500.75,4335 ; v3(4514.5,4362.5) 4514.5,4348.75 E3.1@4500.75,4335 ; R3.1@9124,4001 v3(9144.5,4001)
  Top Layer w20: v1@3352.23,3137.74 3370.74,3156.25
  Bottom Layer w10: U1.H12@3329.96,3137.24 v1(3351.73,3137.24) v1@3352.23,3137.74
  Bottom Layer w15.5: R12.2@5374,3365 5374,3377 v2(5387,3390)
  Bottom Layer w20: v1@3352.23,3137.74 3355.74,3141.25 3401.73,3141.25 C54.1@3441.73,3141.25
VDDA_GPO: C7.1 C8.1 C9.1 C10.1 C11.1 E1.1 R22.1 TP240.1 U1.B8 | length 183.6
  Top Layer w13: C11.1@3202.21,2911.26 3207.71,2911.26 ; C9.1@3207.71,2877.51 3207.71,2911.26 ; C10.1@3210.21,2934.26 3207.71,2931.76 3207.71,2911.26
  Top Layer w15.5: C8.1@3172.71,2877.51 C9.1@3207.71,2877.51 ; v1@3218.96,2931.76 v1(3219.72,2932.52) ; v2(4064,2066) R22.1@4064,2128
  Bottom Layer w10: U1.B8@3203.97,2948.27 v1(3219.72,2932.52)
pads on no net: P1. P1.C2 P1.C3 P1.C6 P1.C7 P1.C22 P1.C23 P1.D4 P1.D5 P1.D20 P1.D21 P1.D29 P1.D33 P1.D34 P1.G2 P1.G3 P1.G30 P1.G31 P1.G33 P1.G34 P1.G36 P1.G37 P1.H1 P1.H5 P1.H32 P1.H34 P1.H35 P1.H37 P1.H38 U1.A3 U1.M3 U2.8 U4.8 U5.12
copper on no net: | length 1259.4
  Top Layer w20: v2(5114.18,2115) 5160,2115 ; v2(5114.18,3665) 5160,3665 ; v2(5114.18,3765) 5160,3765 ; v2(5114.18,3815) 5160,3815 ; v2(5114.18,3915) 5160,3915 ; v2(5114.18,3965) 5160,3965 ; 5210,2165 v2(5255.82,2165) ; 5210,2215 v2(5255.82,2215) ; 5210,3565 v2(5255.82,3565) ; 5210,3615 v2(5255.82,3615) ; 5210,3715 v2(5255.82,3715) ; 5210,3765 v2(5255.82,3765) ; 5210,3865 v2@5255.82,3865 ; 5210,3915 v2(5255.82,3915) ; v2(5314.18,2265) 5360,2265 ; v2(5314.18,2315) 5360,2315 ; v2(5314.18,3065) 5360,3065 ; v2(5314.18,3115) 5360,3115 ; v2(5314.18,3515) 5360,3515 ; v2(5314.18,3715) 5360,3715 ; v2(5314.18,3765) 5360,3765 ; 5410,2165 v2(5455.82,2165) ; 5410,2215 v2(5455.82,2215) ; 5410,2365 v2(5455.82,2365) ; 5410,2415 v2(5455.82,2415) ; 5410,3165 v2(5455.82,3165) ; 5410,3215 v2(5455.82,3215)
  Bottom Layer w10: v1(3046.49,2894.5) 3046.49,2916.77
  other v1: 3015,3438
  other v2: 5256.2,3865.2
  other v3: 4659.25,4270.25

## Other copper
Bottom Layer:
  pour cut-out: 2362,3517.7 2734.35,3517.7 2760.61,3516.96 2765.85,3516.63 cw(c2762.67,3512.44) 2767.57,3514.34 ccw(c2808.52,3530.21) 2852.43,3530.21 ccw(c2808.52,3530.21) 2849.47,3546.09 ccw(c2762.67,3512.44) 2785.92,3602.58 ccw(c2774.95,3560.08) 2777.67,3603.89 2765.43,3604.66 ccw(c2762.63,3561.13) 2763.85,3604.73 2736.25,3605.51 ccw(c2734.98,3562.04) 2734.97,3605.53 2362,3605.53 ccw(c2362,3561.61)
  pour cut-out: 3142.1,3715.24 ccw(c2489.28,3492.27) 2489.28,4182.11 2374.28,4182.11 cw(c2374.28,4226.03) 2374.28,4269.94 2489.28,4269.94 cw(c2489.28,3492.27) 3225.21,3743.63 cw(c3059.48,3687.02) 3234.61,3687.02 cw(c3059.48,3687.02) 3232.35,3658.97 cw(c3189,3666.01) 3145.66,3673.04 ccw(c3059.48,3687.02) 3146.78,3687.02 ccw(c3059.48,3687.02) 3142.12,3715.17 ccw(c3059.48,3687.02)
  pour cut-out: 2378.73,1907.56 2493.73,1907.56 ccw(c2493.73,2752.58) 3267.43,2412.82 3268.4,2415.22 ccw(c3061.15,2492.01) 3282.13,2487.6 3282.13,2487.65 3282.9,2526.12 ccw(c3239,2526.99) 3282.91,2526.99 ccw(c3239,2526.99) 3195.09,2527.87 3194.32,2489.4 ccw(c3238.23,2488.47) 3194.32,2489.35 3194.32,2489.4 3194.32,2489.35 cw(c3061.15,2492.01) 3194.32,2489.27 cw(c3061.15,2492.01) 3186.47,2446.88 cw(c2493.73,2752.58) 2493.73,1995.39 2378.73,1995.39 ccw(c2378.73,1951.47)
  pour cut-out: 2585.45,2591.32 cw(c2495.93,2501.67) 2585.51,2591.26 2585.5,2591.27 2608.1,2568.66 ccw(c2639.16,2599.7) 2608.11,2568.65 ccw(c2782.55,2743.1) 2782.57,2496.4 2782.56,2496.4 ccw(c2782.56,2667.9) 2903.84,2546.63 2915.9,2558.69 ccw(c2884.84,2589.74) 2915.98,2558.77 2917.78,2560.58 ccw(c2886.64,2591.55) 2923.36,2567.46 2943.09,2597.44 ccw(c2906.4,2621.58) 2950.32,2621.58 ccw(c2906.4,2621.58) 2869.72,2645.72 2852.4,2619.41 2841.73,2608.73 ccw(c2872.78,2577.68) 2841.68,2608.68 ccw(c2782.56,2667.9) 2841.73,2608.73 2841.68,2608.68 cw(c2782.56,2667.9) 2782.56,2584.23 ccw(c2782.56,2540.31) 2782.56,2584.23 cw(c2782.55,2743.1) 2670.27,2630.7 cw(c2782.55,2743.1) 2670.22,2630.76 2670.22,2630.75 2647.62,2653.36 ccw(c2616.56,2622.31) 2647.62,2653.36 ccw(c2495.93,2501.67) 2495.93,2716.2 2375.06,2716.2 ccw(c2375.06,2672.28) 2375.06,2628.37 2495.93,2628.37 cw(c2495.93,2501.67)
  pour cut-out: 687 vertices and 0 holes, not listed, extent 2659.73,2603.49 3543.24,3599
  region net TX2A_P: 3258,2841 3258,2801 3219,2742 3204,2742 3201,2744 3201,2803 3203,2838 3205,2844 3253,2844 3258,2841
  region net TX2A_N: 3119.98,2840.75 3119.98,2800.75 3158.98,2741.75 3173.98,2741.75 3176.98,2743.75 3176.98,2802.75 3174.98,2837.75 3172.98,2843.75 3124.98,2843.75 3119.98,2840.75
  region net TX1A_P: 3169.98,3352.6 3169.98,3392.6 3208.98,3451.6 3223.98,3451.6 3226.98,3449.6 3226.98,3390.6 3224.98,3355.6 3222.98,3349.6 3174.98,3349.6 3169.98,3352.6
  region net TX1A_N: 3306.6,3352.6 3306.6,3392.6 3267.6,3451.6 3252.6,3451.6 3249.6,3449.6 3249.6,3390.6 3251.6,3355.6 3253.6,3349.6 3301.6,3349.6 3306.6,3352.6

## Silkscreen, mask and mechanical layers (free items; w line width, h text height)
Top Overlay:
  lines w2: 3924,2136 4159,2136 4633,2136 ; 3979,2144 4167,2144 ; 4157,2144 4644,2144
  lines w4: 2371,1426 2371,3691 2371,5139
  lines w7.99: 2411.65,1735 5640,1735 ; 2411.65,4451.54 5640,4451.54
  lines w8: 2410,1735 2410,4451.54 ; 5640,1735 5640,4451.54
  lines w10: 4864,3628.5 5640.5,3628.5
Bottom Solder:
  lines w11.55: 2374.28,4226.03 2489.28,4226.03 cw(c2489.28,3492.27) 3183.65,3729.44 cw(c3059.48,3687.02) 3189,3666.01
  lines w15.5: 2375.06,2672.28 2495.92,2672.28 cw(c2495.93,2501.67) 2616.56,2622.31 2639.16,2599.7 ccw(c2782.55,2743.1) 2782.56,2540.31 ccw(c2782.56,2667.9) 2872.78,2577.68 2884.84,2589.74 2886.64,2591.55 2906.4,2621.58 ; 2378.73,1951.47 2493.73,1951.47 ccw(c2493.73,2752.58) 3227.23,2430.47 ccw(c3061.15,2492.01) 3238.23,2488.47 3239,2526.99 ; 2382,3561.61 2734.97,3561.61 2762.61,3560.83 2774.95,3560.05 cw(c2762.67,3512.44) 2808.52,3530.21